# Altium PCB Placa_Alimentacion_v3.PcbDoc (part 2 of 2)
Units mm, origin at the board's own origin, x right, y up, seen from the top; angles counter-clockwise.
Board outline 100 x 70 mm, 2 copper layers (Top Layer, Bottom Layer), stack 1.571 mm thick; 157 components, 80 nets, 555 pads, 135 vias.
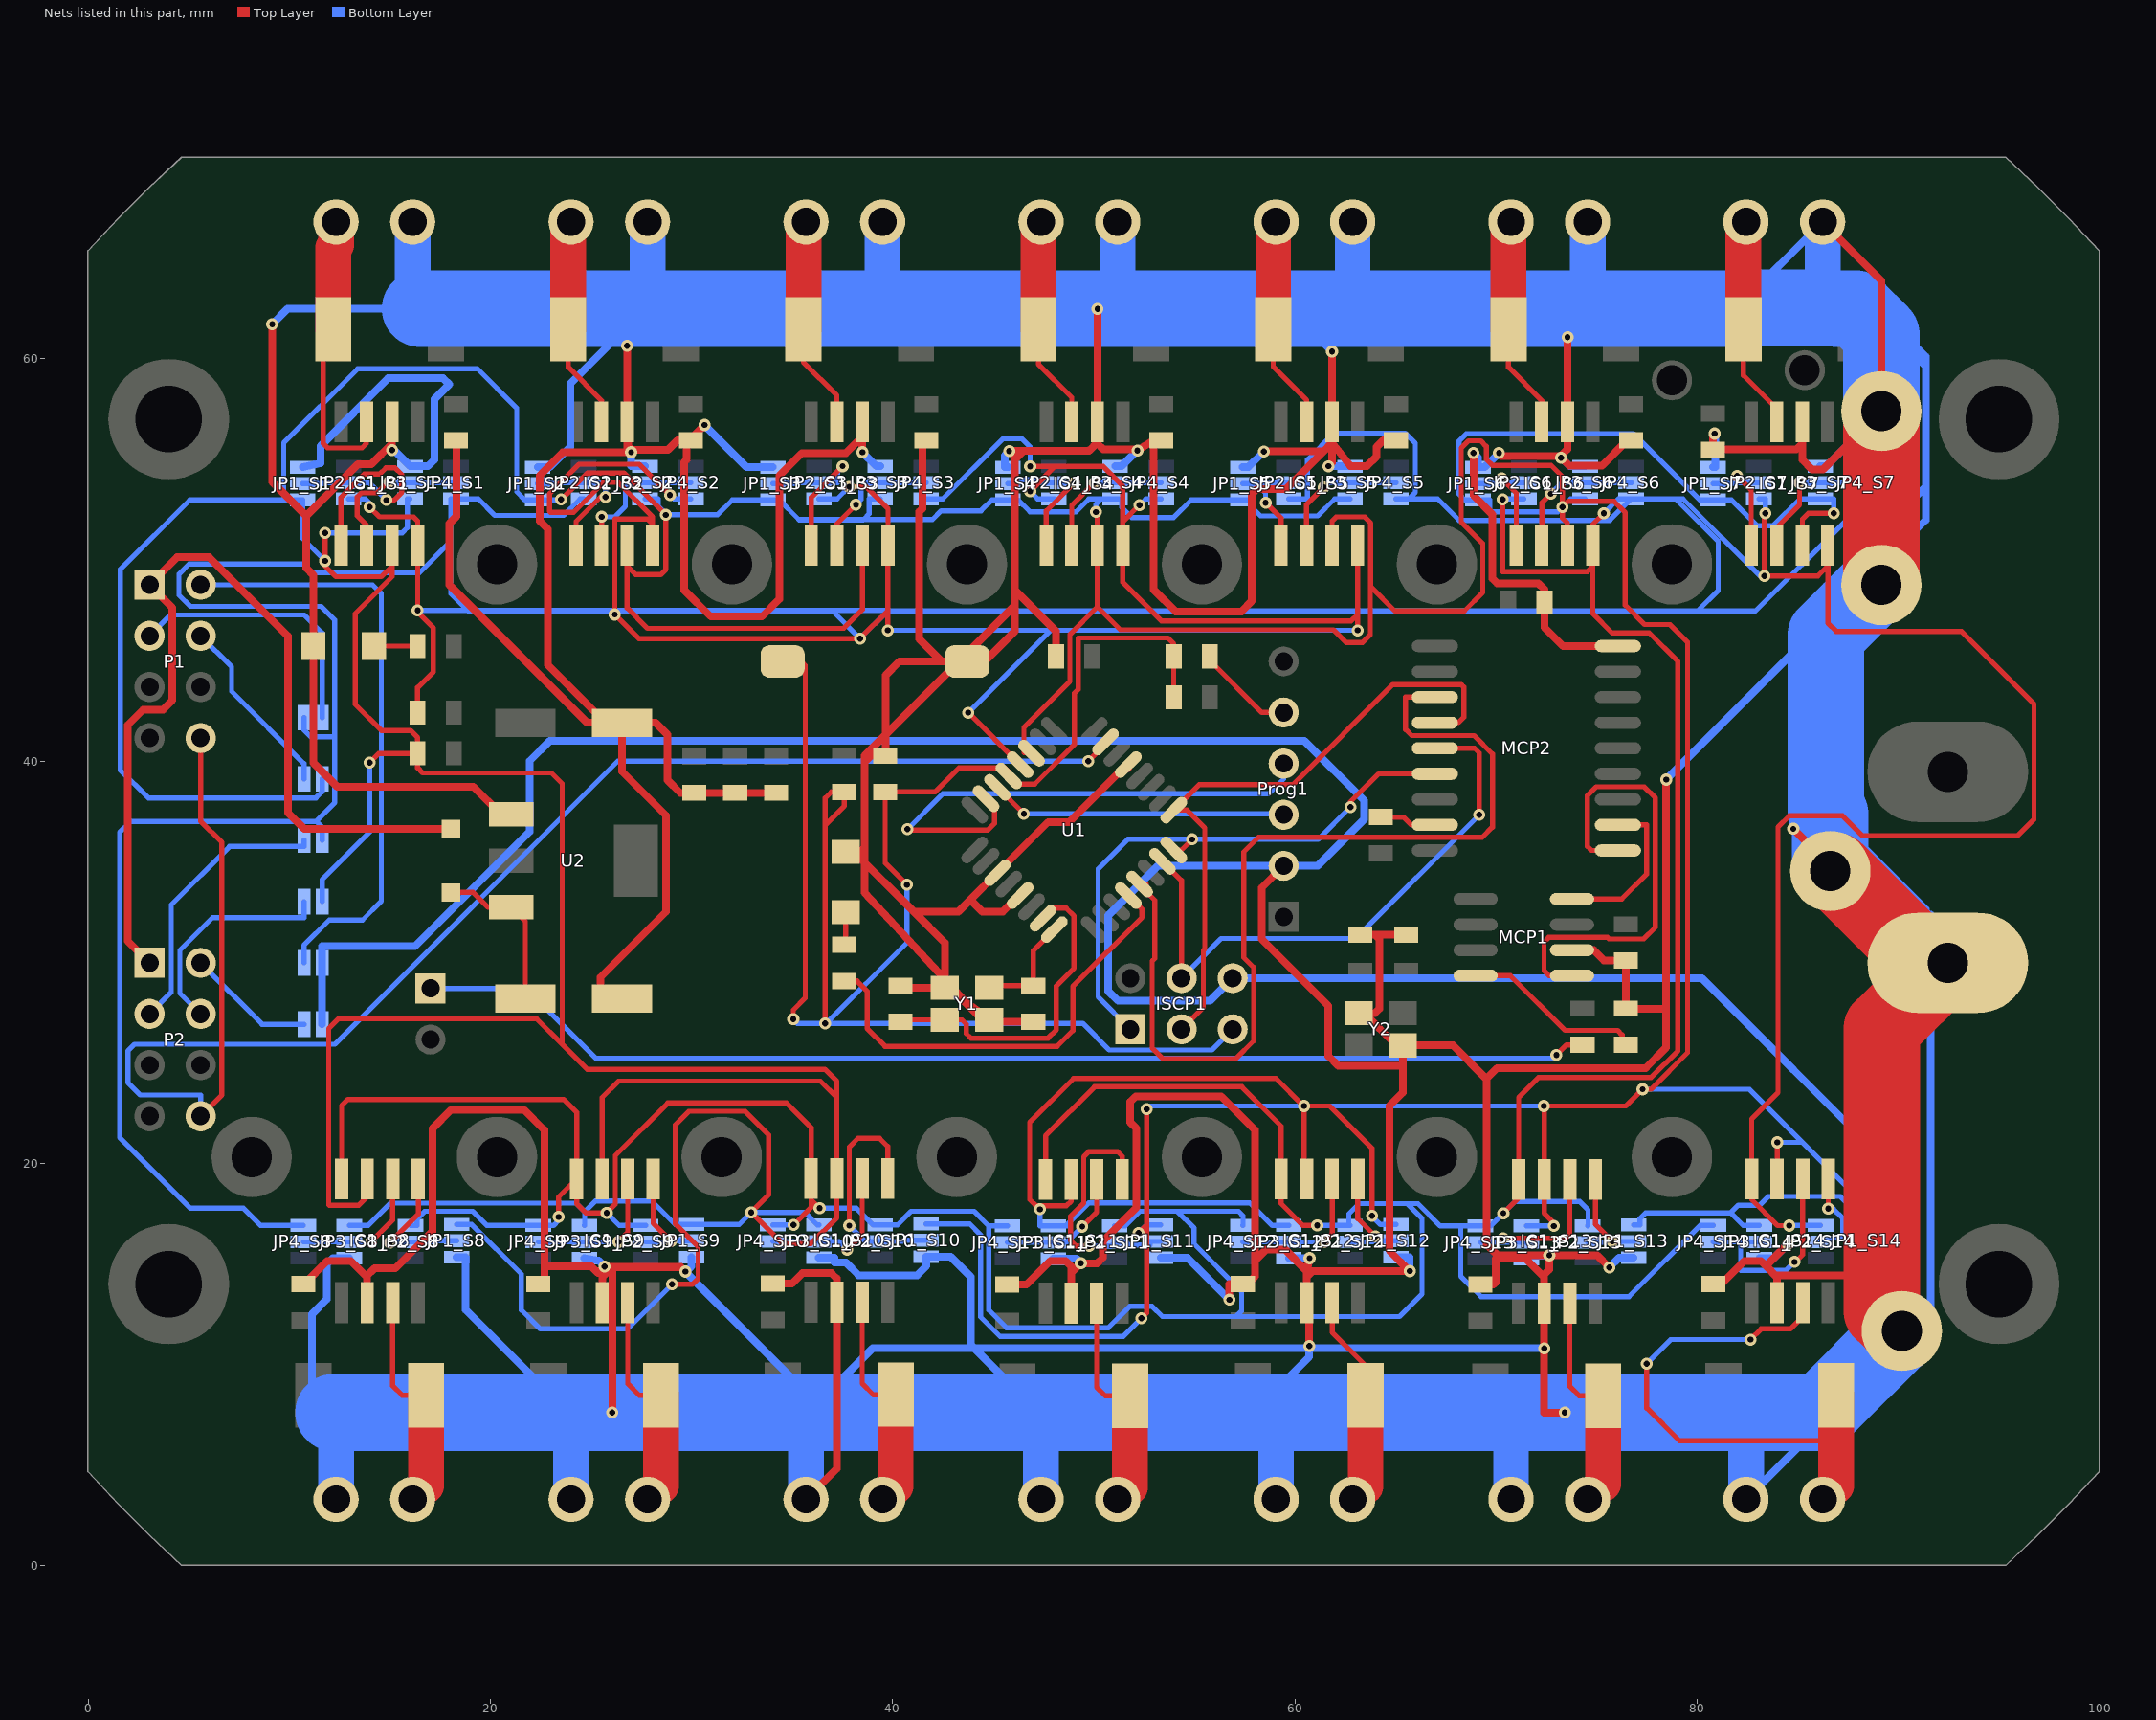
[diagram p2: the nets of this part, all layers, seen from the top]

## Via types
v1: diameter 0.6, hole 0.3, Top Layer to Bottom Layer, 135 vias

## Nets (pads, with @x,y where several pads share a name; then routed paths per layer and width w, separated by ;. In a path a pad name is that pad's centre, name@x,y a point inside that pad or via, vN(x,y) a via of type N, cw(c..) or ccw(c..) an arc to the next point about the centre after c; other vN are vias at no path point) (continued)
GND: 5V.C C2.- C3.2 C4.2 C5.2 C6.2 C7.2 C8.2 C9.2 C10.- C11.2 C12.2 C13.2 C14_S1.2 C14_S2.2 C14_S3.2 C14_S4.2 C14_S5.2 C14_S6.2 C14_S7.2 C14_S8.2 C14_S9.2 C14_S10.2 C14_S11.2 C14_S12.2 C14_S13.2 C14_S14.2 C15.2 GND1.2 GND2.2 IC1_S1.6 IC1_S2.6 IC1_S3.6 IC1_S4.6 IC1_S5.6 IC1_S6.6 IC1_S7.6 IC1_S8.6 IC1_S9.6 IC1_S10.6 IC1_S11.6 IC1_S12.6 IC1_S13.6 IC1_S14.6 ISCP1.6 JP1_S1.1 JP1_S2.1 JP1_S3.1 JP1_S4.1 JP1_S5.1 JP1_S6.1 JP1_S7.1 JP1_S8.1 JP1_S9.1 JP1_S10.1 JP1_S11.1 JP1_S12.1 JP1_S13.1 JP1_S14.1 JP3_S1.1 JP3_S2.1 JP3_S3.1 JP3_S4.1 JP3_S5.1 JP3_S6.1 JP3_S7.1 JP3_S8.1 JP3_S9.1 JP3_S10.1 JP3_S11.1 JP3_S12.1 JP3_S13.1 JP3_S14.1 L1.C M_C1.2 M_C2.2 M_C3.2 M_C4.2 M_C5.2 M_C6.2 M_C7.2 M_C8.2 M_C9.2 M_C10.2 M_C11.2 M_C12.2 M_C13.2 M_C14.2 MCP1.2 MCP2.9 pad.19 Prog1.2 R9.1 S1.2 U1.3 U1.5 U1.21 U2.1 WJ45C-B-2P.1 Y1.2 Y1.4 Y2.2 Y2.4 | length 1497.9
  Top Layer w0.381: v1(9.144,61.722) 9.144,53.876 10.836,52.183 ; C14_S8.2@10.693,14.006 10.736,14.006 11.887,15.158 13.056,15.158 13.826,14.388 ; IC1_S8.6@13.868,13.081 13.868,14.345 13.826,14.388 ; v1(15.107,55.468) 15.107,55.798 ; IC1_S1.6@15.107,56.871 15.107,55.798 ; C14_S1.2@18.282,55.945 18.304,55.945 18.304,52.166 17.948,51.81 17.948,48.768 24.806,41.91 C10.-@25.721,41.91 ; U2.1@21.031,37.363 20.514,37.363 19.148,38.729 12.386,38.729 11.2,39.915 5V.C@11.2,45.72 11.2,49.245 10.836,49.609 10.836,52.183 ; C14_S9.2@22.377,14.006 22.673,14.006 22.673,14.879 ; IC1_S9.6@25.552,13.081 25.552,14.345 26.053,14.846 v1(26.053,7.614) ; v1@25.67,14.853 29.455,14.853 v1(29.683,14.625) ; v1(25.67,14.879) 25.345,14.553 25.019,14.879 22.673,14.879 ; C2.-@26.53,28.194 25.477,28.194 25.477,29.265 28.718,32.506 28.718,37.307 26.53,39.495 C10.-@26.53,41.91 ; v1(26.791,60.649) IC1_S2.6@26.791,56.871 ; v1(26.991,55.353) v1@26.87,55.474 ; C14_S2.2@29.966,55.945 C14_S2.2@29.759,55.945 ; v1(30.648,56.712) 29.966,56.03 29.844,56.03 C14_S2.2@29.759,55.945 ; C14_S10.2@34.036,14.032 34.992,14.032 35.507,14.547 36.948,14.547 37.211,14.284 IC1_S10.6@37.211,13.106 37.211,4.826 M_C10.2@35.687,3.302 ; C4.2@34.198,38.424 C5.2@32.166,38.424 C6.2@30.134,38.424 29.429,38.424 28.794,39.059 28.794,41.326 28.21,41.91 C10.-@26.53,41.91 ; L1.C@37.654,35.49 L1.C@38.065,35.49 ; v1(38.487,55.357) IC1_S3.6@38.487,56.128 ; IC1_S3.6@38.487,56.871 IC1_S3.6@38.487,56.128 ; C8.2@40.386,28.84 40.386,28.74 Y1.4@42.588,28.74 ; C14_S3.2@41.662,55.945 41.469,55.945 41.469,52.547 41.316,52.394 41.316,46.07 42.428,44.958 ; Y1.2@44.788,27.14 44.466,27.14 42.866,28.74 Y1.4@42.588,28.74 ; C14_S11.2@45.695,13.981 46.65,13.981 47.827,15.158 48.588,15.158 48.87,14.876 48.87,14.564 ; v1(45.787,55.417) v1@46.066,55.417 ; U1.5@46.335,33.323 46.277,33.323 45.466,32.512 44.45,32.512 43.855,33.107 ; C9.2@46.99,27.04 44.788,27.04 44.738,27.09 44.224,27.604 43.653,28.01 42.797,28.934 42.588,29.159 38.599,33.462 38.599,35.719 ; C7.2@48.122,45.212 48.122,46.451 46.066,48.507 ; IC1_S11.6@48.87,13.056 48.87,14.564 ; v1(49.352,15.046) v1@49.335,15.029 ; IC1_S4.6@50.171,56.871 50.171,55.798 ; v1(50.181,62.478) 50.181,55.849 49.749,55.417 ; U1.21@51.709,39.829 51.709,39.644 51.451,39.644 48.784,36.977 47.726,36.977 45.466,34.717 U1.3@45.204,34.455 43.855,33.107 ; v1(52.162,55.442) v1@52.244,55.493 ; C14_S4.2@53.346,55.945 C14_S4.2@52.975,55.945 ; v1(56.734,13.228) 56.734,14.006 C14_S12.2@57.404,14.006 57.623,14.006 58.004,14.387 58.004,15.158 ; v1(58.451,55.392) 61.408,55.392 ; Prog1.2@59.436,34.798 58.334,33.696 58.334,31.16 61.662,27.833 61.662,25.343 62.144,24.861 65.362,24.861 ; v1(60.706,10.922) 60.706,12.954 IC1_S12.6@60.579,13.081 60.579,14.355 ; v1(60.722,15.291) 60.579,14.641 ; v1(61.662,54.661) 61.843,54.842 61.843,55.827 ; v1(61.843,60.367) IC1_S5.6@61.843,56.871 61.843,55.827 ; Y2.4@63.162,27.47 Y2.4@63.44,27.47 ; C12.2@63.246,31.38 63.973,31.38 ; C14_S5.2@65.018,55.945 64.38,55.945 64.049,55.615 64.049,55.143 63.567,54.661 62.754,54.661 61.843,55.827 ; C13.2@65.532,31.38 63.973,31.38 ; v1(68.875,55.315) 68.875,53.207 69.815,52.267 69.815,49.082 70.059,48.838 72.101,48.838 72.401,48.539 C11.2@72.401,47.879 72.401,46.639 73.32,45.72 MCP2.9@76.051,45.72 ; C14_S13.2@69.215,13.981 69.856,13.981 69.966,14.091 69.966,15.269 71.466,15.269 72.39,14.345 IC1_S13.6@72.39,13.694 ; v1(70.14,55.315) 70.28,55.175 73.209,55.175 73.539,55.505 IC1_S6.6@73.539,56.871 v1@73.539,61.081 ; v1(72.39,10.815) IC1_S13.6@72.39,13.056 IC1_S13.6@72.39,13.694 ; v1(73.228,55.087) 73.635,54.68 75.256,54.68 76.521,55.945 C14_S6.2@76.714,55.945 ; v1(73.406,7.62) 72.386,7.62 72.381,7.614 72.381,13.685 IC1_S13.6@72.39,13.694 ; MCP1.2@73.774,30.607 74.844,30.607 75.363,30.088 C15.2@76.454,30.088 R9.1@76.454,27.697 78.451,27.697 ; v1(75.626,14.828) 75.016,15.438 v1(72.644,15.438) ; v1(78.451,39.085) 78.451,27.697 ; C14_S14.2@80.797,14.006 81.194,14.006 82.346,15.158 83.16,15.158 83.412,14.905 ; v1(80.864,56.281) 80.772,56.188 C14_S7.2@80.772,55.488 84.923,55.488 85.223,55.788 ; IC1_S14.6@83.972,13.081 83.972,14.345 ; v1(84.509,16.002) 83.412,14.905 ; v1(84.776,36.636) pad.19@86.868,34.544 ; IC1_S7.6@85.223,56.871 85.223,55.788 ; M_C7.2@86.233,66.802 89.154,63.881 pad.19@89.154,57.397 86.256,54.499 85.709,54.499 85.223,54.985 85.223,55.788 ; pad.19@90.17,11.677 87.401,14.447 83.972,14.447 83.972,14.345 ; 10.836,52.183 13.41,54.757 14.066,54.757 15.107,55.798 ; 13.826,14.388 14.232,14.794 15.273,14.794 17.11,16.631 17.11,21.737 18.05,22.676 21.657,22.676 22.673,21.66 22.673,14.879 ; C10.-@25.721,41.91 C10.-@26.53,41.91 ; C10.-@25.721,41.91 22.851,44.78 22.851,51.532 22.444,51.939 22.444,54.198 23.6,55.353 26.791,55.353 v1@26.791,55.553 ; v1@26.791,55.553 v1@26.87,55.474 ; v1@26.791,55.553 IC1_S2.6@26.791,56.871 ; IC1_S2.6@26.791,56.871 v1@26.87,55.474 ; v1@26.87,55.474 28.825,55.474 29.297,55.945 C14_S2.2@29.759,55.945 ; C14_S2.2@29.759,55.945 29.759,54.985 29.632,54.858 29.632,48.508 30.953,47.187 33.493,47.187 34.357,48.051 34.357,54.194 35.478,55.315 37.674,55.315 IC1_S3.6@38.487,56.128 ; L1.C@38.065,35.49 41.043,32.512 ; L1.C@38.065,35.49 38.37,35.49 38.599,35.719 ; 38.599,35.719 38.599,39.948 ; 38.599,39.948 38.92,40.27 C3.2@39.624,40.27 39.64,40.27 39.64,44.272 40.326,44.958 42.428,44.958 ; 38.599,39.948 38.599,40.279 46.041,47.721 46.041,54.96 46.498,55.417 49.749,55.417 ; 41.043,32.512 43.261,32.512 43.855,33.107 ; 41.043,32.512 42.588,30.967 Y1.4@42.588,28.74 ; 42.428,44.958 S1.2@43.711,44.958 44.569,44.958 46.066,46.456 46.066,48.507 ; 46.066,48.507 v1@46.066,55.417 ; v1@46.066,55.417 49.749,55.417 ; 48.87,14.564 v1@49.335,15.029 ; v1@49.335,15.029 50.156,15.029 50.435,15.309 50.435,16.129 52.111,17.805 52.111,21.748 51.807,22.052 51.807,23.065 52.086,23.344 56.32,23.344 58.004,21.66 58.004,15.158 ; 49.749,55.417 50.171,55.798 ; 50.171,55.798 50.476,55.493 v1@52.244,55.493 ; v1@52.244,55.493 C14_S4.2@52.975,55.945 ; C14_S4.2@52.975,55.945 52.975,48.534 54.067,47.441 57.344,47.441 57.852,47.949 57.852,53.266 58.098,53.512 59.528,53.512 61.408,55.392 ; 58.004,15.158 58.563,15.717 59.503,15.717 60.579,14.641 ; 60.579,14.355 60.579,14.641 ; 60.579,14.355 60.874,14.65 v1(65.7,14.65) 64.684,15.666 64.684,22.854 65.362,23.532 65.362,24.861 ; 61.408,55.392 61.843,55.827 ; Y2.4@63.44,27.47 63.973,27.47 64.202,27.699 64.202,31.151 63.973,31.38 ; Y2.4@63.44,27.47 65.04,25.87 Y2.2@65.362,25.87 ; 65.362,24.861 Y2.2@65.362,25.87 ; Y2.2@65.362,25.87 67.856,25.87 69.528,24.198 69.528,15.971 70.061,15.438 70.069,15.438 ; 70.069,15.438 69.536,15.971 69.536,24.241 70.044,24.749 77.435,24.749 78.451,25.765 78.451,27.697 ; 70.069,15.438 v1(72.644,15.438) ; IC1_S13.6@72.39,13.694 72.39,14.478 72.644,14.732 v1(72.644,15.438) ; 83.412,14.905 83.972,14.345
  Top Layer w3.81: pad.19@86.868,34.544 91.44,29.972 WJ45C-B-2P.1@92.456,29.972 89.183,26.699 89.183,12.664 pad.19@90.17,11.677 ; pad.19@89.154,48.761 pad.19@89.154,57.397
  Bottom Layer w0.381: v1(9.144,61.722) 9.906,62.484 16.51,62.484 16.129,62.865 ; JP1_S1.1@10.662,54.61 11.548,54.813 11.548,55.671 14.91,59.033 17.644,59.033 17.948,58.728 17.212,57.992 17.212,54.985 16.887,54.661 JP3_S1.1@15.996,54.661 15.189,55.468 v1(15.107,55.468) ; GND2.2@11.626,26.924 GND1.2@11.626,29.972 11.626,30.804 16.247,30.804 21.936,36.494 21.936,39.999 22.952,41.015 60.468,41.015 63.44,38.043 63.44,37.104 61.134,34.798 Prog1.2@59.436,34.798 53.184,34.798 50.714,32.328 50.714,28.569 51.197,28.087 55.773,28.087 ISCP1.6@56.896,29.21 80.223,29.21 89.399,20.035 89.399,15.564 89.176,15.342 JP1_S14.1@88.417,15.342 ; 12.192,7.62 12.259,7.62 12.259,7.538 ; JP3_S8.1@12.979,15.291 12.157,15.291 11.852,14.986 11.852,13.253 11.116,12.516 11.116,8.681 12.259,7.538 ; JP1_S8.1@18.313,15.342 18.761,15.342 18.761,12.735 24.003,7.493 ; JP1_S2.1@22.346,54.61 22.952,54.61 23.958,55.616 23.958,58.756 27.813,62.611 ; JP3_S9.1@24.663,15.291 25.365,15.183 v1(25.67,14.879) ; v1(26.791,60.649) 27.813,61.672 27.813,62.611 ; v1(26.991,55.353) 26.991,54.661 JP3_S2.1@27.68,54.661 ; v1(29.683,14.625) 36.694,7.614 ; v1@29.734,14.625 29.997,14.888 JP1_S9.1@29.997,15.342 ; v1(30.648,56.712) 30.648,56.687 32.725,54.61 JP1_S3.1@34.042,54.61 ; 34.483,8.301 35.278,7.603 35.542,7.62 35.549,7.614 ; 35.454,7.614 35.549,7.614 ; 35.687,7.493 39.009,10.815 44.049,10.815 ; JP3_S10.1@36.322,15.316 37.092,15.316 37.092,15.08 37.666,15.08 38.3,14.447 41.215,14.447 41.672,14.904 JP1_S10.1@41.672,15.367 ; v1(38.487,55.357) 39.183,54.661 JP3_S3.1@39.376,54.661 ; JP1_S10.1@41.656,15.367 JP1_S10.1@41.672,15.367 ; JP1_S4.1@45.726,54.61 45.558,54.61 45.558,55.188 v1(45.787,55.417) v1@46.066,55.417 ; 47.371,7.493 44.049,10.815 ; JP3_S11.1@47.981,15.265 49.132,15.265 v1(49.352,15.046) ; v1(50.181,62.478) 88.51,62.478 91.354,59.633 ; JP3_S4.1@51.06,54.661 51.381,54.661 v1(52.162,55.442) ; JP1_S11.1@53.315,15.316 54.646,15.316 v1(56.734,13.228) ; JP1_S5.1@57.398,54.61 57.669,54.61 v1(58.451,55.392) ; 59.055,7.493 59.055,8.732 60.706,10.383 v1@60.706,10.815 ; JP3_S12.1@59.69,15.291 v1(60.722,15.291) ; v1(60.706,10.922) v1@60.706,10.815 ; v1(61.662,54.661) JP3_S5.1@62.732,54.661 ; v1(61.843,60.367) 59.599,62.611 ; JP1_S12.1@65.024,15.342 65.7,15.342 v1(65.7,14.65) ; v1(68.875,55.315) 69.094,55.097 JP1_S6.1@69.094,54.61 69.434,54.61 v1(70.14,55.315) ; JP3_S13.1@71.501,15.265 71.654,15.418 72.624,15.418 v1(72.644,15.438) ; v1(72.39,10.815) v1@60.706,10.815 ; v1(73.228,55.087) 73.654,54.661 JP3_S6.1@74.428,54.661 ; v1(73.406,7.62) 70.612,7.62 36.699,7.62 36.694,7.614 ; v1(73.549,61.081) 90.389,61.081 91.354,60.116 91.354,51.988 v1(78.451,39.085) ; v1(75.626,14.828) 76.114,15.316 JP1_S13.1@76.835,15.316 ; JP1_S7.1@80.778,54.61 80.89,54.61 80.89,56.255 v1(80.864,56.281) ; M_C14.2@82.423,3.302 pad.19@91.608,12.487 ; 82.423,7.493 88.265,7.493 91.608,10.836 91.608,32.379 pad.19@91.608,11.684 ; JP3_S14.1@83.083,15.291 83.798,15.291 v1(84.509,16.002) ; v1(84.776,36.636) 84.776,44.644 86.399,46.267 pad.19@88.9,48.768 ; JP3_S7.1@86.112,54.661 86.418,54.661 pad.19@89.154,57.397 ; 86.233,62.539 85.716,63.057 85.716,64.135 86.233,64.135 ; M_C7.2@86.233,66.802 82.042,62.611 74.549,62.611 62.865,62.611 59.599,62.611 ; pad.19@86.614,34.537 86.614,37.368 ; 86.614,39.227 86.614,37.373 ; 86.614,43.606 86.614,37.368 ; 86.949,62.484 87.884,62.484 ; 91.354,53.647 86.401,48.694 86.401,37.586 88.032,35.955 91.354,32.633 86.614,37.373 ; WJ45C-B-2P.1@91.608,32.278 86.614,37.272 86.614,37.368 ; 12.259,7.538 12.259,7.182 12.319,7.182 12.319,7.493 24.003,7.493 ; 24.003,7.493 24.124,7.614 35.549,7.614 ; 27.813,62.611 39.497,62.611 51.181,62.611 59.599,62.611 ; 35.549,7.614 36.694,7.614 ; JP1_S10.1@41.672,15.367 42.885,15.367 43.882,14.371 43.882,10.982 44.049,10.815 ; 44.049,10.815 v1@60.706,10.815 ; 86.614,37.368 86.614,37.373
  Bottom Layer w1.778: M_C8.2@12.319,3.302 12.319,7.493 ; 16.129,62.865 M_C1.2@16.129,66.802 ; M_C9.2@24.003,3.302 24.003,7.493 ; 27.813,62.611 M_C2.2@27.813,66.802 ; M_C10.2@35.687,3.302 35.687,7.493 ; 39.497,62.611 M_C3.2@39.497,66.802 ; M_C11.2@47.371,3.302 47.371,7.493 ; 51.181,62.611 M_C4.2@51.181,66.802 ; M_C12.2@59.055,3.302 59.055,7.493 ; 62.865,62.611 M_C5.2@62.865,66.802 ; 70.612,7.62 70.739,7.493 M_C13.2@70.739,3.302 ; 74.549,62.611 M_C6.2@74.549,66.802 ; M_C14.2@82.423,3.302 82.423,7.493 ; 86.233,64.135 M_C7.2@86.233,66.802
  Bottom Layer w3.81: 12.192,7.62 70.612,7.62 86.113,7.62 pad.19@90.17,11.677 ; 16.51,62.484 81.707,62.484 81.762,62.539 86.233,62.539 ; pad.19@86.614,34.537 86.614,37.368 86.399,37.584 86.399,46.267 pad.19@88.9,48.768 ; 86.949,62.484 87.884,62.484 89.154,61.214 pad.19@89.154,57.397
INT: MCP2.12 U1.13 | length 48.3
  Top Layer w0.254: U1.13@52.275,33.889 52.594,33.889 52.594,33.522 53.026,33.09 53.026,30.194 52.899,30.067 52.899,25.743 53.425,25.216 57.064,25.216 57.953,26.105 57.953,29.738 57.445,30.246 57.445,35.478 58.182,36.215 69.307,36.215 69.815,36.723 69.815,40.355 68.901,41.269 65.802,41.269 65.497,41.574 65.497,43.18 MCP2.12@66.951,43.18
LED1: R8.2 U1.12 | length 22.5
  Top Layer w0.254: R8.2@37.592,29.072 38.223,29.072 38.726,28.569 38.726,26.715 39.614,25.826 48.174,25.826 48.954,26.606 48.954,28.799 52.391,32.235 52.391,32.642 U1.12@51.709,33.323
M_S1: IC1_S1.7 M_C1.1 R10_S1.1 | length 14.8
  Top Layer w0.254: R10_S1.1@12.18,61.468 12.18,61.309 11.987,61.309 11.675,60.997 11.675,55.798 11.903,55.569 13.608,55.569 13.837,55.798 IC1_S1.7@13.837,56.871
  Top Layer w1.778: R10_S1.1@12.18,61.468 12.18,65.532 12.319,65.671 M_C1.1@12.319,66.802
M_S2: IC1_S2.7 M_C2.1 R10_S2.1 | length 10.8
  Top Layer w0.254: R10_S2.1@23.864,61.468 23.864,59.583 25.521,57.926 IC1_S2.7@25.521,56.871 ; M_C2.1@23.864,66.663 24.003,66.663 M_C2.1@24.003,66.802
  Top Layer w1.778: R10_S2.1@23.864,61.468 M_C2.1@23.864,66.663
M_S3: IC1_S3.7 M_C3.1 R10_S3.1 | length 10.7
  Top Layer w0.254: R10_S3.1@35.56,61.468 35.56,59.837 37.217,58.18 IC1_S3.7@37.217,56.871 ; M_C3.1@35.56,66.675 35.687,66.675 M_C3.1@35.687,66.802
  Top Layer w1.778: R10_S3.1@35.56,61.468 M_C3.1@35.56,66.675
M_S4: IC1_S4.7 M_C4.1 R10_S4.1 | length 10.7
  Top Layer w0.254: R10_S4.1@47.244,61.468 47.244,59.735 48.901,58.078 IC1_S4.7@48.901,56.871 ; M_C4.1@47.244,66.675 47.371,66.675 M_C4.1@47.371,66.802
  Top Layer w1.778: R10_S4.1@47.244,61.468 M_C4.1@47.244,66.675
M_S5: IC1_S5.7 M_C5.1 R10_S5.1 | length 10.8
  Top Layer w0.254: R10_S5.1@58.916,61.468 58.916,59.608 60.573,57.951 IC1_S5.7@60.573,56.871 ; M_C5.1@58.916,66.663 59.055,66.663 M_C5.1@59.055,66.802
  Top Layer w1.778: R10_S5.1@58.916,61.468 M_C5.1@58.916,66.663
M_S6: IC1_S6.7 M_C6.1 R10_S6.1 | length 10.7
  Top Layer w0.254: R10_S6.1@70.612,61.468 70.612,59.583 72.269,57.926 IC1_S6.7@72.269,56.871 ; M_C6.1@70.612,66.675 M_C6.1@70.739,66.802
  Top Layer w1.778: R10_S6.1@70.612,61.468 M_C6.1@70.612,66.675
M_S7: IC1_S7.7 M_C7.1 R10_S7.1 | length 10.7
  Top Layer w0.254: R10_S7.1@82.296,61.468 82.296,59.174 83.953,57.517 IC1_S7.7@83.953,56.871 ; M_C7.1@82.296,66.675 M_C7.1@82.423,66.802
  Top Layer w1.778: R10_S7.1@82.296,61.468 M_C7.1@82.296,66.675
M_S8: IC1_S8.7 M_C8.1 R10_S8.1 | length 11.8
  Top Layer w0.254: IC1_S8.7@15.138,13.081 15.138,8.951 15.612,8.478 16.795,8.478 R10_S8.1@16.795,8.484 ; M_C8.1@16.129,3.302 16.129,3.968 M_C8.1@16.795,3.968
  Top Layer w1.778: M_C8.1@16.795,3.968 R10_S8.1@16.795,8.484
M_S9: IC1_S9.7 M_C9.1 R10_S9.1 | length 11.8
  Top Layer w0.254: IC1_S9.7@26.822,13.081 26.822,9.053 27.397,8.478 28.479,8.478 R10_S9.1@28.479,8.484 ; M_C9.1@27.813,3.302 27.813,3.968 M_C9.1@28.479,3.968
  Top Layer w1.778: M_C9.1@28.479,3.968 R10_S9.1@28.479,8.484
M_S10: IC1_S10.7 M_C10.1 R10_S10.1 | length 11.8
  Top Layer w0.254: IC1_S10.7@38.481,13.106 38.481,9.062 39.04,8.503 40.138,8.503 R10_S10.1@40.138,8.509 ; M_C10.1@39.497,3.302 39.497,3.943 M_C10.1@40.138,3.943
  Top Layer w1.778: M_C10.1@40.138,3.943 R10_S10.1@40.138,8.509
M_S11: IC1_S11.7 M_C11.1 R10_S11.1 | length 11.8
  Top Layer w0.254: IC1_S11.7@50.14,13.056 50.14,8.875 50.562,8.452 51.797,8.452 R10_S11.1@51.797,8.458 ; M_C11.1@51.181,3.302 51.181,3.918 M_C11.1@51.797,3.918
  Top Layer w1.778: M_C11.1@51.797,3.918 R10_S11.1@51.797,8.458
M_S12: IC1_S12.7 M_C12.1 R10_S12.1 | length 11.1
  Top Layer w0.254: IC1_S12.7@61.849,13.081 61.849,11.608 63.506,9.951 R10_S12.1@63.506,8.484 ; M_C12.1@62.865,3.302 62.865,3.943 M_C12.1@63.506,3.943
  Top Layer w1.778: M_C12.1@63.506,3.943 R10_S12.1@63.506,8.484
M_S13: IC1_S13.7 M_C13.1 R10_S13.1 | length 11.9
  Top Layer w0.254: IC1_S13.7@73.66,13.056 73.66,8.926 74.133,8.452 75.317,8.452 R10_S13.1@75.317,8.458 ; M_C13.1@74.549,3.302 74.549,4.07 M_C13.1@75.317,4.07
  Top Layer w1.778: M_C13.1@75.317,4.07 R10_S13.1@75.317,8.458
M_S14: IC1_S14.7 M_C14.1 R10_S14.1 | length 29.6
  Top Layer w0.254: v1(77.486,10.053) 77.486,7.843 79.112,6.217 86.493,6.217 86.899,6.624 R10_S14.1@86.899,8.484 ; v1(82.642,11.246) 83.176,11.78 84.633,11.78 85.242,12.389 IC1_S14.7@85.242,13.081 ; M_C14.1@86.233,3.302 86.233,3.968 M_C14.1@86.899,3.968
  Top Layer w1.778: M_C14.1@86.899,3.968 R10_S14.1@86.899,8.484
  Bottom Layer w0.254: v1(77.486,10.053) 78.68,11.246 v1(82.642,11.246)
MISO: ISCP1.1 MCP2.15 U1.16 | length 28.6
  Top Layer w0.254: U1.16@53.972,35.586 54.361,35.586 v1(54.888,36.113) ; v1(62.754,37.713) 62.754,37.975 64.149,39.37 MCP2.15@66.951,39.37
  Bottom Layer w0.254: ISCP1.1@51.816,26.67 50.206,28.28 50.206,34.64 51.68,36.113 v1(54.888,36.113) 61.154,36.113 v1(62.754,37.713)
MOSI: ISCP1.4 MCP2.14 U1.15 | length 29.7
  Top Layer w0.254: U1.15@53.406,35.02 54.356,34.07 ISCP1.4@54.356,29.21 ; MCP2.14@66.951,40.64 68.931,40.64 69.155,40.417 v1(69.155,37.332)
  Bottom Layer w0.254: ISCP1.4@54.356,29.21 56.331,31.185 63.008,31.185 v1(69.155,37.332)
Net5V_A: 5V.A R2.1 | length 2.2
  Top Layer w0.254: 5V.A@14.2,45.72 R2.1@16.372,45.72
NetC1_2: C1.2 Prog1.5 | length 5
  Top Layer w0.254: C1.2@55.764,45.212 55.764,45.003 58.349,42.418 Prog1.5@59.436,42.418
NetC2_+: C2.+ D1.C U2.3 | length 8.1
  Top Layer w0.254: D1.C@18.034,33.477 19.142,33.477 19.879,32.741 U2.3@21.031,32.741 21.73,32.042 C2.+@21.73,28.194
NetE_C1_1: E_C1.1 R6.2 | length 59
  Top Layer w0.254: v1(72.995,25.394) 73.498,25.897 R6.2@74.295,25.897
  Bottom Layer w0.254: E_C1.1@17.018,28.702 21.753,28.702 25.22,25.235 72.836,25.235 v1(72.995,25.394)
NetGND1_1: GND1.1 P1.2 | length 30.1
  Bottom Layer w0.254: P1.2@5.588,48.768 14.133,48.768 14.57,48.33 14.57,33.04 13.63,32.1 11.979,32.1 10.726,30.846 GND1.1@10.726,29.972
NetGND2_1: GND2.1 P2.2 | length 6.4
  Bottom Layer w0.254: P2.2@5.588,29.972 8.642,26.918 10.726,26.918 GND2.1@10.726,26.924
NetIC1_S1_1: IC1_S1.1 JP1_S1.2 JP2_S1.2 | length 12.5
  Top Layer w0.254: IC1_S1.1@12.567,50.724 12.567,53.109 13.732,54.274 14.494,54.274 14.799,54.579 15.256,54.579 15.586,54.249 15.586,53.36 15.205,52.979 v1(14.824,52.979)
  Bottom Layer w0.254: JP1_S1.2@10.662,53.797 11.776,53.797 11.827,53.848 JP2_S1.2@12.948,53.848 13.955,53.848 v1(14.824,52.979)
NetIC1_S1_2: IC1_S1.2 JP3_S1.2 JP4_S1.2 | length 7.8
  Top Layer w0.254: IC1_S1.2@13.837,50.724 13.837,51.734 13.376,52.195 13.376,53.131 13.58,53.334 14.351,53.334 14.91,53.893 v1(14.977,53.893)
  Bottom Layer w0.254: v1(14.977,53.893) 15.022,53.848 JP3_S1.2@15.996,53.848 JP4_S1.2@18.282,53.848
NetIC1_S2_1: IC1_S2.1 JP1_S2.2 JP2_S2.2 | length 7.1
  Top Layer w0.254: IC1_S2.1@24.251,50.724 24.251,51.915 25.467,53.131 v1(25.721,53.131)
  Bottom Layer w0.254: JP1_S2.2@22.346,53.797 23.46,53.797 23.511,53.848 JP2_S2.2@24.632,53.848 25.41,53.848 25.721,53.537 v1(25.721,53.131)
NetIC1_S2_2: IC1_S2.2 JP3_S2.2 JP4_S2.2 | length 7.1
  Top Layer w0.254: IC1_S2.2@25.521,50.724 v1(25.521,52.146)
  Bottom Layer w0.254: v1(25.521,52.146) 26.178,52.146 26.706,52.674 26.706,53.608 26.946,53.848 JP3_S2.2@27.68,53.848 JP4_S2.2@29.966,53.848
NetIC1_S3_1: IC1_S3.1 JP1_S3.2 JP2_S3.2 | length 8.7
  Top Layer w0.254: IC1_S3.1@35.947,50.724 35.947,53.101 v1(37.506,54.661)
  Bottom Layer w0.254: JP1_S3.2@34.042,53.797 35.144,53.797 35.195,53.848 JP2_S3.2@36.328,53.848 37.258,53.848 37.258,54.412 v1(37.506,54.661)
NetIC1_S3_2: IC1_S3.2 JP3_S3.2 JP4_S3.2 | length 6.7
  Top Layer w0.254: IC1_S3.2@37.217,50.724 37.217,51.799 v1(38.167,52.749)
  Bottom Layer w0.254: v1(38.167,52.749) 38.416,52.998 38.416,53.563 38.701,53.848 JP3_S3.2@39.376,53.848 JP4_S3.2@41.662,53.848
NetIC1_S4_1: IC1_S4.1 JP1_S4.2 JP2_S4.2 | length 7.2
  Top Layer w0.254: IC1_S4.1@47.631,50.724 47.631,52.441 v1(49.038,53.848)
  Bottom Layer w0.254: JP1_S4.2@45.726,53.797 46.249,53.797 46.447,53.995 47.261,53.995 47.407,53.848 JP2_S4.2@48.012,53.848 v1(49.038,53.848)
NetIC1_S4_2: IC1_S4.2 JP3_S4.2 JP4_S4.2 | length 6.9
  Top Layer w0.254: IC1_S4.2@48.901,50.724 48.901,52.72 v1(50.029,53.848)
  Bottom Layer w0.254: v1(50.029,53.848) JP3_S4.2@51.06,53.848 JP4_S4.2@53.346,53.848
NetIC1_S5_1: IC1_S5.1 JP1_S5.2 JP2_S5.2 | length 5.9
  Top Layer w0.254: v1(58.538,52.852) 59.303,52.086 IC1_S5.1@59.303,50.724
  Bottom Layer w0.254: JP1_S5.2@57.398,53.797 58.075,53.797 ; v1(58.538,52.852) 58.538,53.334 58.075,53.797 ; JP2_S5.2@59.684,53.848 58.563,53.848 58.512,53.797 58.075,53.797
NetIC1_S5_2: IC1_S5.2 JP3_S5.2 JP4_S5.2 | length 6.9
  Top Layer w0.254: IC1_S5.2@60.573,50.724 60.573,52.753 v1(61.433,53.614)
  Bottom Layer w0.254: v1(61.433,53.614) 61.668,53.848 JP3_S5.2@62.732,53.848 JP4_S5.2@65.018,53.848
NetIC1_S6_1: IC1_S6.1 JP1_S6.2 JP2_S6.2 | length 6.2
  Top Layer w0.254: v1(70.272,54.045) 70.999,53.319 IC1_S6.1@70.999,50.724
  Bottom Layer w0.254: JP1_S6.2@69.094,53.797 70.196,53.797 70.247,53.848 v1@70.47,53.848 ; v1(70.272,54.045) v1@70.47,53.848 ; JP2_S6.2@71.38,53.848 v1@70.47,53.848
NetIC1_S6_2: IC1_S6.2 JP3_S6.2 JP4_S6.2 | length 7
  Top Layer w0.254: IC1_S6.2@72.269,50.724 72.269,52.842 v1(72.716,53.289)
  Bottom Layer w0.254: v1(72.716,53.289) 73.275,53.848 JP3_S6.2@74.428,53.848 JP4_S6.2@76.714,53.848
NetIC1_S7_1: IC1_S7.1 JP1_S7.2 JP2_S7.2 | length 6.5
  Top Layer w0.254: v1(81.982,54.172) 82.683,53.471 IC1_S7.1@82.683,50.724
  Bottom Layer w0.254: JP1_S7.2@80.778,53.797 81.88,53.797 81.931,53.848 82.306,53.848 ; v1(81.982,54.172) 82.306,53.848 ; JP2_S7.2@83.064,53.848 82.306,53.848
NetIC1_S7_2: IC1_S7.2 JP3_S7.2 JP4_S7.2 | length 6.9
  Top Layer w0.254: IC1_S7.2@83.953,50.724 83.953,51.613 85.081,52.74 v1(85.081,53.848)
  Bottom Layer w0.254: v1(85.081,53.848) JP3_S7.2@86.112,53.848 JP4_S7.2@88.398,53.848
NetIC1_S8_1: IC1_S8.1 JP1_S8.2 JP2_S8.2 | length 7.1
  Top Layer w0.254: v1(15.002,16.072) 16.408,17.479 IC1_S8.1@16.408,19.228
  Bottom Layer w0.254: v1(15.002,16.072) 15.033,16.104 JP2_S8.2@16.027,16.104 17.136,16.104 17.186,16.154 JP1_S8.2@18.313,16.154
NetIC1_S8_2: IC1_S8.2 JP3_S8.2 JP4_S8.2 | length 6.9
  Top Layer w0.254: v1(14.052,16.104) 15.138,17.19 IC1_S8.2@15.138,19.228
  Bottom Layer w0.254: JP4_S8.2@10.693,16.104 JP3_S8.2@12.979,16.104 v1(14.052,16.104)
NetIC1_S9_1: IC1_S9.1 JP1_S9.2 JP2_S9.2 | length 5.9
  Top Layer w0.254: IC1_S9.1@28.092,19.228 28.092,17.028 v1(28.972,16.149)
  Bottom Layer w0.254: JP2_S9.2@27.711,16.104 v1@28.82,16.104 ; v1(28.972,16.149) 28.927,16.104 v1@28.82,16.104 ; JP1_S9.2@29.997,16.154 28.87,16.154 v1@28.82,16.104
NetIC1_S9_2: IC1_S9.2 JP3_S9.2 JP4_S9.2 | length 7.3
  Top Layer w0.254: v1(26.356,16.104) 26.822,16.57 IC1_S9.2@26.822,19.228
  Bottom Layer w0.254: JP4_S9.2@22.377,16.104 JP3_S9.2@24.663,16.104 v1(26.356,16.104)
NetIC1_S10_1: IC1_S10.1 JP1_S10.2 JP2_S10.2 | length 11.9
  Top Layer w0.254: v1(37.837,16.911) 37.837,20.822 38.268,21.254 39.345,21.254 39.751,20.848 IC1_S10.1@39.751,19.253
  Bottom Layer w0.254: v1(37.837,16.911) 38.618,16.129 JP2_S10.2@39.37,16.129 40.478,16.129 40.529,16.18 JP1_S10.2@41.656,16.18
NetIC1_S10_2: IC1_S10.2 JP3_S10.2 JP4_S10.2 | length 7.7
  Top Layer w0.254: v1(37.735,15.723) 38.481,16.469 IC1_S10.2@38.481,19.253
  Bottom Layer w0.254: JP4_S10.2@34.036,16.129 JP3_S10.2@36.322,16.129 37.329,16.129 v1(37.735,15.723)
NetIC1_S11_1: IC1_S11.1 JP1_S11.2 JP2_S11.2 | length 12.6
  Top Layer w0.254: v1(49.775,15.9) 49.114,15.9 48.835,16.179 48.835,17.368 49.495,18.028 49.495,20.34 49.749,20.594 51.172,20.594 51.41,20.356 IC1_S11.1@51.41,19.202
  Bottom Layer w0.254: v1(49.775,15.9) 50.85,15.9 JP2_S11.2@51.029,16.078 51.634,16.078 51.767,15.945 52.781,15.945 52.792,15.956 52.792,16.129 JP1_S11.2@53.315,16.129
NetIC1_S11_2: IC1_S11.2 JP3_S11.2 JP4_S11.2 | length 6.7
  Top Layer w0.254: v1(49.419,16.866) 50.14,17.586 IC1_S11.2@50.14,19.202
  Bottom Layer w0.254: JP4_S11.2@45.695,16.078 JP3_S11.2@47.981,16.078 48.632,16.078 v1(49.419,16.866)
NetIC1_S12_1: IC1_S12.1 JP1_S12.2 JP2_S12.2 | length 5.8
  Top Layer w0.254: IC1_S12.1@63.119,19.228 63.119,17.257 v1(63.999,16.377)
  Bottom Layer w0.254: JP2_S12.2@62.738,16.104 63.846,16.104 63.897,16.154 64.221,16.154 ; v1(63.999,16.377) 64.221,16.154 ; JP1_S12.2@65.024,16.154 64.221,16.154
NetIC1_S12_2: IC1_S12.2 JP3_S12.2 JP4_S12.2 | length 7.3
  Top Layer w0.254: v1(61.455,16.104) 61.849,16.497 IC1_S12.2@61.849,19.228
  Bottom Layer w0.254: JP4_S12.2@57.404,16.104 JP3_S12.2@59.69,16.104 v1(61.455,16.104)
NetIC1_S13_1: IC1_S13.1 JP1_S13.2 JP2_S13.2 | length 5.7
  Top Layer w0.254: IC1_S13.1@74.93,19.202 74.93,16.983 v1(75.784,16.129)
  Bottom Layer w0.254: JP2_S13.2@74.549,16.078 75.657,16.078 75.708,16.129 v1(75.784,16.129) JP1_S13.2@76.835,16.129
NetIC1_S13_2: IC1_S13.2 JP3_S13.2 JP4_S13.2 | length 8.7
  Top Layer w0.254: v1(70.349,16.276) 73.422,16.276 73.66,16.514 IC1_S13.2@73.66,19.202
  Bottom Layer w0.254: JP4_S13.2@69.215,16.078 v1@70.151,16.078 ; v1(70.349,16.276) v1@70.151,16.078 ; JP3_S13.2@71.501,16.078 v1@70.151,16.078
NetIC1_S14_1: IC1_S14.1 JP1_S14.2 JP2_S14.2 | length 6.9
  Top Layer w0.254: v1(86.512,17.749) IC1_S14.1@86.512,19.228
  Bottom Layer w0.254: JP2_S14.2@86.131,16.104 87.24,16.39 ; v1(86.512,17.749) 86.757,17.749 87.24,17.266 87.24,16.39 ; 87.24,16.39 JP1_S14.2@88.417,16.154 87.475,16.154 87.24,16.39
NetIC1_S14_2: IC1_S14.2 JP3_S14.2 JP4_S14.2 | length 10.9
  Top Layer w0.254: v1(84.827,15.107) 84.852,15.082 85.242,15.472 IC1_S14.2@85.242,19.228
  Bottom Layer w0.254: JP4_S14.2@80.797,16.104 82.16,16.104 ; JP3_S14.2@83.083,16.104 82.16,16.104 ; v1(84.827,15.107) 84.414,14.694 82.16,14.694 82.16,16.104
NetL1_A: L1.A R8.1 | length 1.7
  Top Layer w0.254: R8.1@37.592,30.872 37.654,30.872 L1.A@37.654,32.49
NetMCP1_1: MCP1.1 MCP2.1 | length 23.2
  Top Layer w0.254: MCP1.1@73.774,29.337 72.629,29.337 72.381,29.585 72.381,31.008 72.609,31.236 75.53,31.236 75.606,31.16 77.334,31.16 77.918,31.744 77.918,38.17 77.359,38.729 74.971,38.729 74.54,38.297 74.54,35.763 74.743,35.56 MCP2.1@76.051,35.56
NetMCP1_4: MCP1.4 MCP2.2 | length 8.1
  Top Layer w0.254: MCP1.4@73.774,33.147 76.241,33.147 77.486,34.392 77.486,36.83 MCP2.2@76.051,36.83
NetMCP1_8: MCP1.8 R9.2 | length 9.2
  Top Layer w0.254: MCP1.8@68.974,29.337 70.704,29.337 73.428,26.613 76.038,26.613 76.267,26.385 76.267,25.897 R9.2@76.454,25.897
NetMCP2_17: MCP2.17 R7.1 | length 2.9
  Top Layer w0.254: R7.1@64.262,37.222 65.396,37.222 65.788,36.83 MCP2.17@66.951,36.83
NetP1_3: P1.3 SCL1.2 | length 13.6
  Bottom Layer w0.254: P1.3@3.048,46.228 4.084,47.264 10.735,47.264 11.626,46.372 SCL1.2@11.626,42.164
NetP1_4: P1.4 SDA1.1 | length 9.2
  Bottom Layer w0.254: P1.4@5.588,46.228 7.128,44.688 7.128,43.47 10.726,39.872 SDA1.1@10.726,39.116
NetP2_3: P2.3 SCL2.2 | length 14
  Bottom Layer w0.254: P2.3@3.048,27.432 4.131,28.515 4.131,32.862 7.026,35.757 10.726,35.757 SCL2.2@10.726,36.068
NetP2_4: P2.4 SDA2.1 | length 11.2
  Bottom Layer w0.254: P2.4@5.588,27.432 4.559,28.461 4.559,30.601 6.185,32.227 10.726,32.227 SDA2.1@10.726,33.02
RESET: C1.1 C3.1 ISCP1.5 R1.1 R3.2 S1.1 U1.29 | length 94.2
  Top Layer w0.254: S1.1@34.521,44.958 35.449,44.958 35.652,44.755 35.652,28.229 35.052,27.629 v1(35.052,27.178) ; v1@36.668,26.944 v1(36.643,26.969) ; v1(40.707,33.852) 39.624,34.935 C3.1@39.624,38.47 42.104,38.47 43.303,39.669 45.558,39.669 45.769,39.458 U1.29@45.769,39.263 45.769,39.077 45.99,38.856 47.057,38.856 49.038,40.837 49.038,43.385 49.216,43.563 49.216,46.121 53.685,46.121 53.964,45.841 C1.1@53.964,45.212 R3.2@53.964,43.18 ; v1(36.643,26.969) 36.643,36.824 ; v1(36.643,26.969) 36.643,26.947 36.65,26.939 v1(36.643,26.969) ; 36.643,36.824 36.643,38.165 36.948,38.47 R1.1@37.592,38.47 37.592,37.773 36.643,36.824
  Bottom Layer w0.254: v1(35.052,27.178) 35.261,26.969 v1(36.643,26.969) v1@36.694,26.969 ; v1@36.668,26.944 v1@36.694,26.969 ; v1(40.707,33.852) 40.707,30.982 v1@36.694,26.969 ; ISCP1.5@56.896,26.67 55.867,25.641 50.765,25.641 49.437,26.969 v1@36.694,26.969
RXP: Prog1.4 U1.31 | length 26.4
  Top Layer w0.254: v1(40.732,36.621) 40.732,36.57 44.72,36.57 45.05,36.9 45.05,37.719 U1.31@44.638,38.132
  Bottom Layer w0.254: v1(40.732,36.621) 42.485,38.374 58.69,38.374 59.436,39.12 Prog1.4@59.436,39.878
SCK: ISCP1.3 MCP2.13 U1.17 | length 32.5
  Top Layer w0.254: ISCP1.3@54.356,26.67 55.439,27.753 55.439,30.594 55.515,30.67 55.515,36.677 54.626,37.566 U1.17@53.972,37.566 55.237,38.831 59.891,38.831 64.869,43.809 68.266,43.809 68.393,43.682 68.393,42.184 68.119,41.91 MCP2.13@66.951,41.91
SCL: IC1_S1.4 IC1_S2.4 IC1_S3.4 IC1_S4.4 IC1_S5.4 IC1_S6.4 IC1_S7.4 IC1_S8.4 IC1_S9.4 IC1_S10.4 IC1_S11.4 IC1_S12.4 IC1_S13.4 IC1_S14.4 JP2_S1.3 JP2_S2.3 JP2_S3.3 JP2_S4.3 JP2_S5.3 JP2_S6.3 JP2_S7.3 JP2_S8.3 JP2_S9.3 JP2_S10.3 JP2_S11.3 JP2_S12.3 JP2_S13.3 JP2_S14.3 JP4_S1.3 JP4_S2.3 JP4_S3.3 JP4_S4.3 JP4_S5.3 JP4_S6.3 JP4_S7.3 JP4_S8.3 JP4_S9.3 JP4_S10.3 JP4_S11.3 JP4_S12.3 JP4_S13.3 JP4_S14.3 R4.1 SCL1.1 SCL2.1 U1.28 | length 650.8
  Top Layer w0.254: IC1_S8.4@12.598,19.228 12.598,22.88 12.903,23.184 23.638,23.184 24.282,22.54 IC1_S9.4@24.282,19.228 ; v1(13.986,52.629) 14.474,52.14 16.174,52.14 16.377,51.937 IC1_S1.4@16.377,50.724 v1(16.377,47.492) 16.377,47.407 17.161,46.623 17.161,44.444 16.372,43.655 R4.1@16.372,42.418 ; v1(23.384,17.342) 23.384,18.329 IC1_S9.4@24.282,19.228 ; IC1_S2.4@28.061,50.724 28.061,51.782 ; v1(28.921,53.233) 27.397,54.757 24.4,54.757 22.927,53.283 22.927,52.425 22.983,52.369 24.131,52.369 25.629,53.868 26.33,53.868 28.061,52.137 28.061,51.782 ; v1(35.068,16.942) 35.941,17.815 35.941,18.197 ; v1(36.363,17.774) 35.941,18.197 ; v1(37.837,53.639) 38.675,53.639 39.767,52.547 39.767,47.492 39.757,47.482 ; v1(39.757,46.502) 39.757,47.482 ; IC1_S3.4@39.757,50.724 39.757,47.482 ; v1(43.755,42.409) U1.28@46.335,39.829 ; v1(46.828,53.41) 48.073,54.655 ; v1(46.828,54.655) 48.073,54.655 ; IC1_S11.4@47.6,19.202 47.6,21.381 50.032,23.814 57.349,23.814 59.309,21.854 IC1_S12.4@59.309,19.228 59.309,18.003 60.395,16.916 v1(61.103,16.916) ; v1(52.264,52.725) 51.441,51.902 ; v1(63.113,46.502) 63.113,47.289 ; IC1_S5.4@63.113,50.724 63.113,47.289 ; v1(70.323,53.004) 70.323,49.423 74.54,49.423 74.809,49.692 ; v1(70.358,17.526) 71.12,18.288 IC1_S13.4@71.12,19.202 71.12,23.286 72.111,24.277 77.71,24.277 79.035,25.602 79.035,44.952 77.613,46.375 75.768,46.375 74.809,47.333 74.809,49.692 ; v1(75.352,52.318) 74.809,51.775 IC1_S6.4@74.809,50.724 74.809,49.692 ; v1(83.379,52.318) 83.328,52.267 v1(83.328,49.21) 86.001,49.21 86.493,49.702 ; v1(84.573,16.911) 83.998,16.911 82.702,18.206 IC1_S14.4@82.702,19.228 82.702,22.21 84.014,23.521 84.014,36.723 84.573,37.281 87.219,37.281 88.21,36.291 95.926,36.291 96.739,37.104 96.739,42.844 93.132,46.451 86.909,46.451 86.493,46.867 86.493,49.702 ; IC1_S7.4@86.493,50.724 86.493,49.702 ; IC1_S9.4@24.282,19.228 24.282,18.003 24.74,17.546 v1(25.777,17.546) 26.203,17.972 26.203,20.398 28.812,23.007 34.712,23.007 35.941,21.778 IC1_S10.4@35.941,19.253 35.941,18.197 ; 28.061,51.782 27.804,52.039 26.178,52.039 v1(26.178,47.289) 27.372,46.095 v1(38.37,46.095) 39.757,47.482 ; 48.073,54.655 50.45,54.655 51.441,53.664 51.441,51.902 ; 51.441,51.902 IC1_S4.4@51.441,50.724 51.441,48.889 53.358,46.972 62.796,46.972 63.113,47.289
  Bottom Layer w0.254: JP4_S8.3@10.693,16.916 8.57,16.916 7.712,17.774 5.086,17.774 1.565,21.295 1.565,36.469 2.099,37.002 11.319,37.002 11.332,37.015 ; SCL1.1@10.726,42.164 10.726,41.549 11.056,41.218 12.208,41.218 12.259,41.269 ; SCL2.1@11.626,36.068 11.626,36.72 11.332,37.015 ; JP2_S1.3@12.948,53.035 13.783,53.035 13.986,52.832 v1(13.986,52.629) ; JP2_S8.3@16.027,16.916 16.348,16.916 16.348,17.241 16.729,17.622 19.118,17.622 19.823,16.916 JP4_S9.3@22.377,16.916 23.13,16.916 23.384,17.17 v1(23.384,17.342) ; v1(16.377,47.492) 18.863,47.492 ; JP2_S2.3@24.632,53.035 24.457,53.035 23.638,52.217 20.215,52.217 19.396,53.035 JP4_S1.3@18.282,53.035 18.025,53.035 18.025,50.921 ; v1(25.777,17.546) 26.407,16.916 JP2_S9.3@27.711,16.916 ; v1(26.178,47.289) v1@26,47.467 ; v1(28.921,53.233) 29.119,53.035 JP4_S2.3@29.966,53.035 ; JP4_S10.3@34.036,16.942 v1(35.068,16.942) ; JP2_S3.3@36.328,53.035 37.233,53.035 v1(37.837,53.639) ; v1(36.363,17.774) 38.192,17.774 39.025,16.942 JP2_S10.3@39.37,16.942 40.23,16.942 40.91,17.622 44.04,17.622 44.771,16.891 ; v1(39.757,46.502) 47.848,46.502 ; 39.767,47.467 80.026,47.467 ; JP4_S3.3@41.662,53.035 42.483,53.035 45.475,56.027 46.422,56.027 46.828,55.62 v1(46.828,54.655) ; v1(43.755,42.409) 47.848,46.502 ; JP4_S11.3@45.695,16.891 44.771,16.891 ; v1(46.828,53.41) 47.203,53.035 JP2_S4.3@48.012,53.035 ; JP2_S11.3@51.029,16.891 51.553,16.891 52.283,17.622 54.143,17.622 ; v1(52.264,52.725) 52.574,53.035 JP4_S4.3@53.346,53.035 ; JP4_S12.3@57.404,16.916 57.42,16.916 57.42,17.393 57.191,17.622 54.143,17.622 ; JP2_S5.3@59.684,53.035 60.62,53.035 60.62,54.985 61.941,56.306 65.472,56.306 65.98,55.798 65.98,53.36 65.655,53.035 ; v1(61.103,16.916) JP2_S12.3@62.678,16.916 ; JP2_S12.3@62.738,16.916 JP2_S12.3@62.678,16.916 ; v1(63.113,46.502) 47.848,46.502 ; JP4_S5.3@65.018,53.035 65.655,53.035 ; v1(70.323,53.004) 70.354,53.035 JP2_S6.3@71.38,53.035 ; JP2_S13.3@74.549,16.891 74.565,16.891 74.565,17.698 74.159,18.104 70.936,18.104 v1(70.358,17.526) 69.723,16.891 JP4_S13.3@69.215,16.891 68.291,16.891 ; v1(75.352,52.318) 76.069,53.035 JP4_S6.3@76.714,53.035 ; JP4_S14.3@80.797,16.916 80.133,16.916 76.597,13.38 69.256,13.38 68.24,14.396 68.24,16.84 68.291,16.891 ; JP2_S7.3@83.064,53.035 83.379,53.035 v1(83.379,52.318) ; v1(83.328,49.21) 83.115,49.21 79.289,53.035 78.928,53.035 ; v1(84.573,16.911) 84.578,16.916 JP2_S14.3@86.131,16.916 ; JP4_S7.3@88.398,53.035 87.652,53.035 87.392,52.775 87.392,51.963 82.896,47.467 80.026,47.467 ; 11.332,37.015 12.259,37.942 12.259,41.269 ; 12.259,41.269 12.259,47.01 11.573,47.695 5.071,47.695 4.512,48.254 4.512,49.296 5.02,49.804 10.704,49.804 11.136,49.372 16.475,49.372 18.025,50.921 ; 18.025,50.921 18.025,48.33 18.863,47.492 ; 18.863,47.492 39.793,47.492 v1(38.37,46.095) 36.998,47.467 v1@26,47.467 ; 18.863,47.492 18.888,47.467 v1@26,47.467 ; 44.771,16.891 44.771,12.72 45.66,11.831 50.714,11.831 51.78,12.897 52.899,12.897 53.407,12.389 57.064,12.389 ; 54.143,17.622 54.982,16.784 54.982,15.996 57.344,13.634 57.344,12.669 57.064,12.389 ; 57.064,12.389 65.192,12.389 66.31,13.507 66.31,17.266 65.573,18.003 ; JP2_S12.3@62.678,16.916 62.678,17.495 63.186,18.003 65.573,18.003 ; 65.573,18.003 66.113,18.003 67.224,16.891 68.291,16.891 ; 65.655,53.035 67.092,53.035 68.159,51.968 75.647,51.968 JP4_S6.3@76.714,53.035 ; JP4_S6.3@76.714,53.035 78.928,53.035 ; 78.928,53.035 81.042,50.921 81.042,48.483 80.026,47.467
SDA: IC1_S1.3 IC1_S2.3 IC1_S3.3 IC1_S4.3 IC1_S5.3 IC1_S6.3 IC1_S7.3 IC1_S8.3 IC1_S9.3 IC1_S10.3 IC1_S11.3 IC1_S12.3 IC1_S13.3 IC1_S14.3 JP1_S1.3 JP1_S2.3 JP1_S3.3 JP1_S4.3 JP1_S5.3 JP1_S6.3 JP1_S7.3 JP1_S8.3 JP1_S9.3 JP1_S10.3 JP1_S11.3 JP1_S12.3 JP1_S13.3 JP1_S14.3 JP3_S1.3 JP3_S2.3 JP3_S3.3 JP3_S4.3 JP3_S5.3 JP3_S6.3 JP3_S7.3 JP3_S8.3 JP3_S9.3 JP3_S10.3 JP3_S11.3 JP3_S12.3 JP3_S13.3 JP3_S14.3 R5.1 SDA1.2 SDA2.2 U1.27 | length 594
  Top Layer w0.254: v1(11.776,51.353) v1(11.776,49.956) 11.776,49.702 12.31,49.169 14.574,49.169 15.107,49.702 ; IC1_S8.3@13.868,19.228 13.868,18.342 13.453,17.927 11.979,17.927 11.954,17.952 11.954,26.715 12.437,27.198 22.292,27.198 23.562,25.928 ; v1(13.986,39.923) 14.449,40.386 R5.1@16.372,40.386 ; IC1_S1.3@15.107,50.724 15.107,49.702 ; v1(23.511,53.004) 24.832,54.325 26.635,54.325 v1(28.718,52.242) 28.718,49.524 28.464,49.27 27.223,49.27 26.791,49.702 ; IC1_S9.3@25.552,19.228 25.552,23.286 26.365,24.099 36.398,24.099 37.211,23.286 ; IC1_S2.3@26.791,50.724 26.791,49.702 ; v1(29.023,13.99) 30.039,13.99 30.318,14.269 30.318,15.869 29.175,17.012 29.175,21.914 29.86,22.599 32.656,22.599 33.823,21.432 33.823,18.435 v1(32.96,17.571) 34.509,16.022 35.932,16.022 37.211,17.301 IC1_S10.3@37.211,19.253 37.211,23.286 ; IC1_S3.3@38.487,50.724 38.487,47.533 37.557,46.603 27.804,46.603 26.791,47.616 26.791,49.702 ; U1.27@46.901,40.394 46.901,40.431 46.523,40.431 46.523,41.684 48.801,43.962 48.801,46.3 50.171,47.67 ; v1(47.311,17.723) v1@47.311,17.901 ; IC1_S11.3@48.87,19.202 48.87,18.13 48.641,17.901 v1@47.311,17.901 ; v1(50.105,52.385) 50.171,52.318 IC1_S4.3@50.171,50.724 50.171,47.67 ; v1(52.213,16.535) 52.619,16.942 ; v1(52.365,12.313) 52.619,12.567 52.619,16.942 ; v1(52.619,22.702) 52.619,16.942 ; IC1_S12.3@60.579,19.228 60.452,19.355 v1(60.452,22.86) ; IC1_S5.3@61.843,50.724 61.843,51.937 62.046,52.14 63.465,52.14 63.745,51.861 ; v1(63.821,17.393) 63.821,20.761 61.722,22.86 v1(60.452,22.86) ; v1(72.363,22.86) v1@72.39,22.86 ; v1(72.863,16.891) 72.863,17.053 72.39,17.526 IC1_S13.3@72.39,19.202 v1@72.39,22.86 ; IC1_S6.3@73.539,50.724 73.539,51.826 73.295,52.07 v1(73.295,52.629) ; IC1_S14.3@83.972,19.228 v1(83.972,21.051) ; IC1_S7.3@85.223,50.724 85.223,52.029 85.512,52.318 v1(86.782,52.318) ; 15.107,49.702 15.107,49.172 13.275,47.34 13.275,42.819 14.57,41.523 16.018,41.523 16.372,41.169 R5.1@16.372,40.386 ; R5.1@16.372,40.386 16.372,39.671 16.628,39.415 23.028,39.415 23.562,38.882 23.562,25.928 ; 23.562,25.928 24.806,24.683 36.627,24.683 37.211,24.099 37.211,23.286 ; v1@47.311,17.901 47.108,17.901 46.803,18.206 46.803,22.041 48.987,24.226 59.055,24.226 60.421,22.86 v1(60.452,22.86) ; 50.171,47.67 51.314,46.527 61.907,46.527 62.534,45.9 63.364,45.9 63.745,46.281 63.745,51.861 ; 63.745,51.861 63.77,51.836 63.77,48.661 64.964,47.467 68.418,47.467 69.335,48.384 69.335,50.817 68.266,51.886 68.266,55.569 68.621,55.925 69.231,55.925 69.51,55.646 69.51,55.011 69.815,54.706 72.726,54.706 73.295,54.137 v1(73.295,52.629) ; v1@72.39,22.86 76.45,22.86 v1(77.283,23.692) 77.7,23.692 79.518,25.51 79.518,45.917 78.646,46.789 77.384,46.789 76.419,47.755 76.419,52.359 75.863,52.915 73.581,52.915 v1(73.295,52.629)
  Bottom Layer w0.254: JP1_S1.3@10.662,52.984 JP1_S1.3@10.659,52.984 ; SDA2.2@11.626,33.02 11.626,34.106 13.986,36.466 v1(13.986,39.923) ; SDA1.2@11.626,39.116 11.626,38.477 11.319,38.17 2.988,38.17 1.591,39.567 1.591,49.53 5.045,52.984 9.922,52.984 ; v1(11.776,49.956) 10.659,51.074 JP1_S1.3@10.659,52.984 ; v1(11.776,51.353) 15.612,51.353 15.866,51.607 15.866,53.035 JP3_S1.3@15.996,53.035 ; JP3_S8.3@12.979,16.916 13.91,16.916 15.022,18.028 24.248,18.028 24.679,17.596 ; JP1_S8.3@18.313,16.967 19.066,16.967 21.53,14.503 21.53,12.72 22.47,11.78 26.813,11.78 v1(29.023,13.99) ; v1(23.511,53.004) 23.491,52.984 JP1_S2.3@22.346,52.984 21.708,52.984 21.301,53.391 21.301,57.551 19.345,59.506 13.402,59.506 9.719,55.823 9.719,53.188 9.922,52.984 ; JP3_S9.3@24.663,16.916 24.679,16.916 24.679,17.596 ; JP3_S2.3@27.68,53.035 28.342,53.035 28.342,52.679 v1@28.779,52.242 ; v1(28.718,52.242) v1@28.779,52.242 ; JP3_S10.3@36.322,16.942 36.256,16.942 35.627,17.571 v1(32.96,17.571) 32.356,16.967 JP1_S9.3@29.997,16.967 29.189,16.967 28.026,18.13 25.213,18.13 24.679,17.596 ; JP3_S3.3@39.376,53.035 38.827,53.035 38.827,52.301 38.539,52.013 ; JP1_S10.3@41.656,16.993 43.826,16.993 44.365,16.453 44.365,12.378 45.344,11.399 51.451,11.399 v1(52.365,12.313) ; v1(47.311,17.723) 47.311,16.891 JP3_S11.3@47.981,16.891 48.657,16.891 48.657,16.949 49.749,18.041 57.75,18.041 58.875,16.916 JP3_S12.3@59.69,16.916 ; v1(50.105,52.385) 50.105,52.781 50.359,53.035 ; v1(52.213,16.535) 52.619,16.942 JP1_S11.3@53.315,16.942 ; v1(52.619,22.702) 52.778,22.86 v1(60.452,22.86) v1(72.363,22.86) ; JP3_S5.3@62.732,53.035 61.972,53.035 61.128,52.191 58.284,52.191 57.903,52.572 57.903,52.984 JP1_S5.3@57.398,52.984 54.835,52.984 53.966,52.115 51.883,52.115 51.375,52.623 51.375,53.035 JP3_S4.3@51.06,53.035 50.359,53.035 ; v1(63.821,17.393) 64.247,16.967 JP1_S12.3@65.024,16.967 ; JP3_S13.3@71.501,16.891 v1(72.863,16.891) ; JP3_S6.3@74.428,53.035 73.701,53.035 v1(73.295,52.629) 73.061,52.394 69.676,52.394 69.676,52.984 JP1_S6.3@69.094,52.984 68.444,52.984 68.164,53.264 68.164,55.925 68.52,56.281 76.831,56.281 80.128,52.984 JP1_S7.3@80.778,52.984 81.697,52.984 82.972,51.709 83.779,51.709 85.106,53.035 JP3_S7.3@86.112,53.035 86.782,53.035 v1(86.782,52.318) ; JP1_S13.3@76.835,16.942 77.156,16.942 77.156,17.263 77.439,17.546 78.629,17.546 81.657,17.546 ; v1(77.283,23.692) 82.591,23.692 85.233,21.051 ; JP3_S14.3@83.083,16.916 82.287,16.916 81.657,17.546 ; v1(83.972,21.051) 85.233,21.051 ; JP1_S14.3@88.417,16.967 JP1_S14.3@88.179,16.967 ; 9.922,52.984 JP1_S1.3@10.659,52.984 ; v1@28.779,52.242 31.278,52.242 32.02,52.984 JP1_S3.3@34.042,52.984 34.357,52.984 35.328,52.013 ; 35.328,52.013 35.353,51.988 38.514,51.988 38.539,52.013 ; 35.328,52.013 38.539,52.013 ; 38.539,52.013 41.977,52.013 42.409,52.445 44.39,52.445 44.929,52.984 JP1_S4.3@45.726,52.984 46.234,52.984 46.824,52.394 49.108,52.394 49.749,53.035 50.359,53.035 ; 81.657,17.546 82.038,17.927 83.099,17.927 83.531,18.358 87.113,18.358 87.671,17.8 87.671,16.967 JP1_S14.3@88.179,16.967 ; 85.233,21.051 88.179,18.104 JP1_S14.3@88.179,16.967
SOS: P1.8 P2.8 U1.23 | length 81.2
  Top Layer w0.254: P2.8@5.588,22.352 6.645,23.409 6.645,35.961 5.588,37.018 P1.8@5.588,41.148 ; v1(49.724,39.999) 49.724,40.009 50.578,40.863 U1.23@50.578,40.96
  Bottom Layer w0.254: P2.8@5.588,22.352 5.588,23.388 2.581,23.413 1.972,24.023 1.972,25.597 2.302,25.928 12.259,25.928 26.33,39.999 v1(49.724,39.999)
TXP: Prog1.3 U1.30 | length 14.8
  Top Layer w0.254: U1.30@45.204,38.697 v1(46.518,37.383)
  Bottom Layer w0.254: v1(46.518,37.383) 59.411,37.383 59.436,37.358 Prog1.3@59.436,37.338
Vin: D1.A P1.1 P2.1 | length 47.5
  Top Layer w0.381: P2.1@3.048,29.972 1.955,31.065 1.955,41.786 2.734,42.565 3.724,42.565 4.182,43.022 4.182,47.634 P1.1@3.048,48.768 4.414,50.134 6.01,50.134 9.922,46.222 9.922,37.44 10.735,36.627 D1.A@18.034,36.627
XTAL1: C8.1 U1.7 Y1.1 | length 16.7
  Top Layer w0.254: C8.1@40.386,27.04 40.386,27.14 Y1.1@42.588,27.14 43.44,27.14 43.653,26.927 43.653,26.461 43.882,26.232 47.717,26.232 48.131,26.647 48.131,28.827 49.013,29.708 49.013,32.303 48.62,32.696 47.78,32.696 47.466,32.382 U1.7@47.466,32.192
XTAL2: C9.1 U1.8 Y1.3 | length 5.5
  Top Layer w0.254: Y1.3@44.788,28.74 44.788,28.84 C9.1@46.981,28.84 ; C9.1@46.99,28.84 C9.1@46.981,28.84 ; U1.8@48.032,31.626 46.981,30.575 C9.1@46.981,28.84
pads on no net: MCP1.5 MCP2.3 MCP2.4 MCP2.5 MCP2.6 MCP2.10 MCP2.11 P1.7 P2.7 Prog1.6 U1.1 U1.2 U1.9 U1.10 U1.11 U1.19 U1.22 U1.24 U1.25 U1.26 U1.32

## Polygon pours and split planes (outlines as drawn)
GND on Bottom Layer "GND BOTTOM PLANE" (solid, pour order 0): -3.556,73.66 -8.382,68.834 -8.382,-6.604 125.222,-6.604 126.492,-5.334 106.426,14.732 106.426,75.692 106.172,75.438 18.542,75.438
GND on Top Layer "GND TOP PLANE" (solid, pour order 2): -5.08,73.914 -8.128,70.866 -8.128,-3.556 -7.874,-3.302 106.68,-3.302 105.664,-2.286 105.664,76.708

## Silkscreen, mask and mechanical layers (free items; w line width, h text height)
Top Overlay:
  text "NC" at 61.214,44.45 h1 r320
  text "DTR" at 61.214,42.164 h1 r320
  text "RX" at 55.88,40.386 h1 r320
  text "TX" at 55.88,37.846 h1 r320
  text "GND" at 55.118,35.814 h1 r320
  text "5V" at 55.88,33.02 h1 r320
Mechanical 2:
  lines w0.2: -0.016,4.679 1.485,3.078 3.036,1.527 4.637,0.026 4.667,0.026 4.732,0.026 4.897,0.026 5.465,0.026 6.877,0.026 11.508,0.026 22.11,0.026 50.803,0.026 95.321,0.026 95.331,0.026 96.932,1.527 98.483,3.078 99.984,4.679 99.984,65.345 99.984,65.373 98.483,66.974 96.932,68.525 95.331,70.026 4.637,70.026 3.036,68.525 1.485,66.974 -0.016,65.373 -0.016,65.345 -0.016,65.297 -0.016,65.129 -0.016,64.707 -0.016,63.291 -0.016,59.899 -0.016,49.637 -0.016,4.679

## Text inside footprints (layer, text, board x,y; h text height)
ISCP1: Top Overlay "1" at 49.784,26.162 h1.27; Top Overlay "2" at 49.276,28.702 h1.27; Top Overlay "5" at 58.42,26.162 h1.27; Top Overlay "6" at 58.42,28.702 h1.27
P1: Bottom Overlay "1" at 2.54,50.546 h1.27 r270; Bottom Overlay "2" at 5.08,50.292 h1.27 r270; Bottom Overlay "7" at 2.54,38.735 h1.27 r270; Bottom Overlay "8" at 4.953,38.735 h1.27 r270
P2: Bottom Overlay "1" at 2.54,31.75 h1.27 r270; Bottom Overlay "2" at 5.08,31.496 h1.27 r270; Bottom Overlay "7" at 2.54,19.939 h1.27 r270; Bottom Overlay "8" at 4.953,19.939 h1.27 r270